# EAGLE board optodist drumdokta 0.1 (EAGLE 6.4)
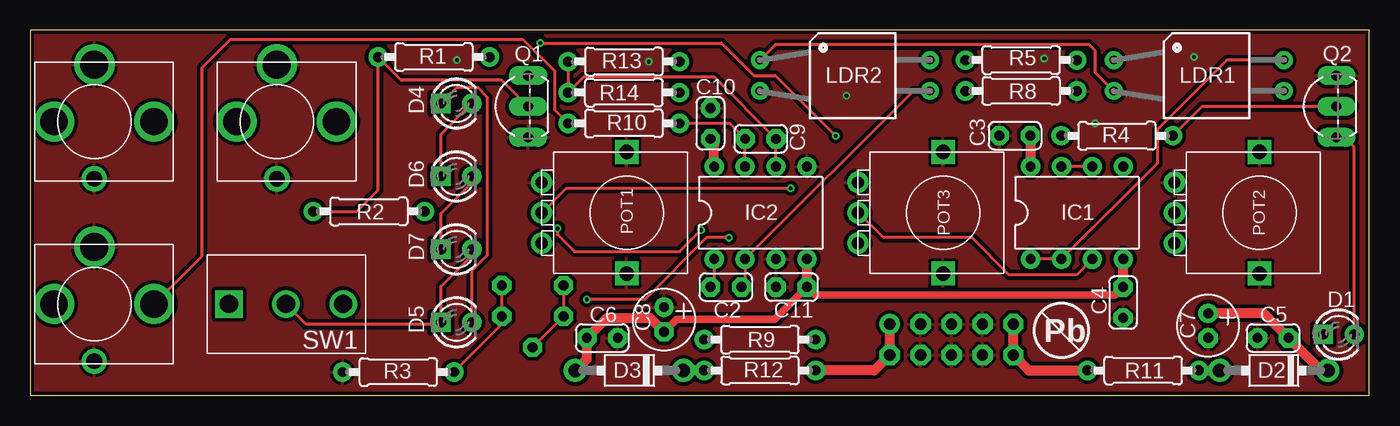
[diagram p0: board, top side]
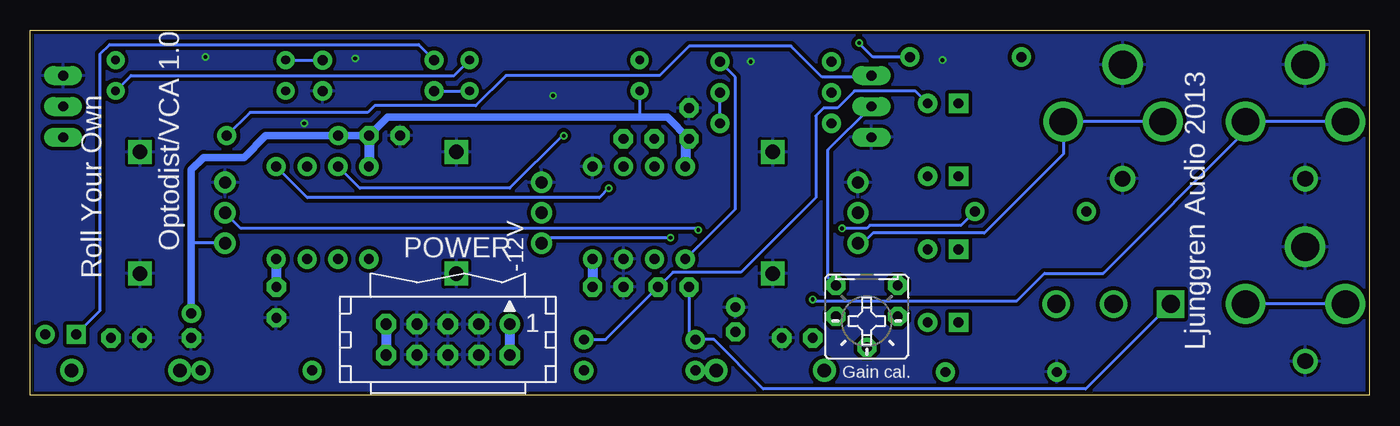
[diagram p1: board, bottom side, seen from below]

Size 110 x 30 mm. Coordinates in mm from the lower left corner, seen from the top.
Outline: 0,0 110,0 110,30 0,30 0,0
Copper layers (1*16): Top 0.035mm / dielectric 1.5mm / Bottom 0.035mm
Design rules "ITEADstudio_DRC 15 mil pads": minimum track width 6mil, minimum drill 12mil, track to track 6mil, track to pad 6mil, pad to pad 6mil, via to via 6mil, smd to smd 0mil, copper to edge 10mil, drill to drill 10mil, minimum pad ring 15mil, minimum via ring 6mil, stop-mask expansion 2mil, vias tented up to drill 100mil, thermal gap 10mil

## Footprints (pad centres in the part's own frame; a part is rotated, then mirrored left to right if it is on the bottom)
C025-024X044 = drill 0.813 octagon: 1 -1.27,0; 2 1.27,0
E2-5 = drill 0.813 pad 1.27: + -1.016,0 | drill 0.813 pad 1.27 octagon: - 1.016,0
ERTHENVAR = drill 2.3: RING1 -4.7,0 | drill 1.3: RING2 4.7,0 | drill 2.25: SHUNT 0,-3.3; TIP 0,4.9
LED3MM = drill 0.813 square: A -1.27,0 | drill 0.813: K 1.27,0
DO41-7 = drill 1.118: A 4.445,0; C -4.445,0
DIL08 = drill 0.813 pad 1.27: 1 -3.81,-3.81; 2 -1.27,-3.81; 3 1.27,-3.81; 4 3.81,-3.81; 5 3.81,3.81; 6 1.27,3.81; 7 -1.27,3.81; 8 -3.81,3.81
VTL5C = drill 0.7 pad 1.3: 1 -7.62,1.27; 2 -7.62,-1.27; 3 6.35,1.27; 4 6.35,-1.27
POT-ALPHA9 = drill 1.2 square: GND$1 -5,0; GND$2 5,0 | drill 1: LEFT -2.5,-7; MID 0,-7; RIGHT 2.5,-7
CON10L = drill 0.914: 1 5.08,1.27 | drill 0.914 octagon: 2 5.08,-1.27; 3 2.54,1.27; 4 2.54,-1.27; 5 0,1.27; 6 0,-1.27; 7 -2.54,1.27; 8 -2.54,-1.27; 9 -5.08,1.27; 10 -5.08,-1.27
TO92-LINE = drill 0.813 long: 1 2.54,0; 2 0,0; 3 -2.54,0
0207/9 = drill 0.813: 1 -4.58,0; 2 4.58,0
SPDT-HORIZONTAL-TOP-SUBMINI-MULTICOMP = drill 1.5 square: 1 4.7,0 | drill 1.5: 2 0,0; 3 -4.7,0
B25P = drill 0.813 octagon: A -2.54,0; AA -2.54,-2.54; E 2.54,0; EE 2.54,-2.54; S 0,2.54

## Placement (x,y rotation side)
C2  100pF  [C025-024X044]  57.15,8.89 180 top
C3  100nF  [C025-024X044]  80.9,21.34 180 top
C4  100nF  [C025-024X044]  89.79,7.62 90 top
C5  100nF  [C025-024X044]  102.11,4.7 180 top
C6  100nF  [C025-024X044]  46.99,4.7 180 top
C7  10uF  [E2-5]  96.77,5.71 270 top
C8  10uF  [E2-5]  52.07,6.22 270 top
C9  100pF  [C025-024X044]  60.01,21.08 180 top
C10  100nF  [C025-024X044]  55.88,22.35 90 top
C11  100nF  [C025-024X044]  62.55,8.89 0 top
CV  ERTHENVAR_3.5MM_JACK  [ERTHENVAR]  20.25,22.5 270 top
D1  [LED3MM]  107.5,5 0 top
D2  SB130  [DO41-7]  102.17,2.03 180 top
D3  SB130  [DO41-7]  49.21,2.03 180 top
D4  [LED3MM]  35,24 0 top
D5  [LED3MM]  35,6 0 top
D6  [LED3MM]  35,18 0 top
D7  [LED3MM]  35,12 0 top
IC1  TL072  [DIL08]  86,15 0 top
IC2  TL072  [DIL08]  60,15 0 top
IN  ERTHENVAR_3.5MM_JACK  [ERTHENVAR]  5.25,22.5 270 top
LDR1  SR2/SR3  [VTL5C]  96.65,26.29 0 top
LDR2  SR2/SR3  [VTL5C]  67.56,26.29 0 top
OUT  ERTHENVAR_3.5MM_JACK  [ERTHENVAR]  5.25,7.5 270 top
POT1  100K lin  [POT-ALPHA9]  49,15 270 top
POT2  25K lin  [POT-ALPHA9]  101,15 270 top
POT3  100K log  [POT-ALPHA9]  75,15 270 top
POWER  [CON10L]  75.69,4.57 0 bottom
Q1  BC557B  [TO92-LINE]  40.89,23.75 90 top
Q2  BC547B  [TO92-LINE]  107.31,23.75 90 top
R1  68K  [0207/9]  33.15,27.81 180 top
R2  100K  [0207/9]  27.81,15.11 180 top
R3  100R  [0207/9]  30.23,1.91 0 top
R4  4.7M  [0207/9]  89.28,21.34 180 top
R5  1K  [0207/9]  81.41,27.56 0 top
R8  remove  [0207/9]  81.41,25.02 180 top
R9  68K  [0207/9]  59.94,4.57 0 top
R10  1K  [0207/9]  48.77,22.35 180 top
R11  10R  [0207/9]  91.44,2.03 0 top
R12  10R  [0207/9]  59.94,2.03 180 top
R13  10K  [0207/9]  48.77,27.43 180 top
R14  10K  [0207/9]  48.77,24.89 0 top
SW1  ON-OFF  [SPDT-HORIZONTAL-TOP-SUBMINI-MULTICOMP]  21,7.5 180 top
TRIM1  2K  [B25P]  41.27,6.48 180 bottom

## Library data of the parts
C2-C11 CV D1-D7 IC1 IC2 IN OUT POT1-POT3 Q1 Q2 R1-R5 R8-R14 SW1 TRIM1 = Roll Your Own
LDR1 LDR2 = Roll Your Own; MF: VACTEC PHOTO; MPN: VTL5C9; OC_FARNELL: 2067857; OC_NEWARK: 95F9033
POWER = Roll Your Own; OC_FARNELL: unknown; OC_NEWARK: unknown

## Nets
0V: C3.2 C4.1 C5.2 C6.1 C7.- C8.+ C10.2 C11.1 CV.RING1 CV.RING2 IC2.3 IC2.5 IN.RING1 IN.RING2 OUT.RING1 OUT.RING2 POT1.GND$1 POT1.GND$2 POT1.LEFT POT2.GND$1 POT2.GND$2 POT2.LEFT POT3.GND$1 POT3.GND$2 POT3.LEFT POWER.3 POWER.4 POWER.5 POWER.6 POWER.7 POWER.8 Q1.3 Q2.1 R3.1 R8.1
+12V: C3.1 C5.1 C7.+ C10.1 D2.C IC1.8 IC2.8 LDR2.2 POT2.RIGHT R4.2
-12V: C4.2 C6.2 C8.- C11.2 D3.A IC1.4 IC2.4
AUDIO_IN: IC1.3 POT3.MID
AUDIO_OUT: C2.2 IC2.1 R9.1 R13.1 SW1.1
CV_IN: D1.A R5.1
N$1: IC1.6 IC1.7 R1.1
N$2: POT2.MID R2.1
N$3: Q1.2 R1.2 R2.2 TRIM1.E TRIM1.EE TRIM1.S
N$4: Q1.1 Q2.2 R4.1
N$5: CV.SHUNT CV.TIP POT1.RIGHT
N$6: D1.K Q2.3
N$7: R3.2 TRIM1.A TRIM1.AA
N$8: IN.SHUNT IN.TIP POT3.RIGHT
N$9: OUT.SHUNT OUT.TIP R10.2
N$10: IC1.1 IC1.2 LDR1.3
N$12: C2.1 D4.K D6.A IC2.2 LDR2.4 R8.2 R9.2
N$13: LDR1.1 R5.2
N$14: LDR1.2 LDR2.1
N$15: LDR1.4 LDR2.3
N$16: D2.A R11.2
N$17: C9.2 IC2.7 R10.1 R14.2
N$18: POWER.1 POWER.2 R12.1
N$19: POWER.9 POWER.10 R11.1
N$20: D3.C R12.2
N$21: C9.1 IC2.6 R13.2 R14.1
N$22: IC1.5 POT1.MID
N$25: D4.A D5.K
N$26: D6.K D7.A
N$27: D5.A D7.K SW1.2

## Tracks (layer width: path | path; a pad name or v marks a point on that pad's centre or on a via)
0V  (via drill 0.3)
  other vias: 95.63,27.81 83.31,27.69 87.5,22.35 67.06,24.64 35.05,27.56 50.8,27.43
  pour Top (isolate 0.305): 0,30 110,30 110,0 0,0
  pour Bottom (isolate 0.305): 0,29.97 109.98,29.97 109.98,0 0,0
+12V
  Top 0.813: D2.C 106.05,2.03 C5.1 101.35,6.73 C7.+ | IC1.8 82.19,20.55 82.17,21.21 | IC2.8 56.19,20.58 56.13,20.64
  Bottom 0.254: POT2.RIGHT 96.7,12.5 96.77,12.57 | LDR2.2 59.94,22.86
  Bottom 0.61: C7.+ 96.77,12.57 96.77,18.54 95.76,19.56 92.46,19.56 90.68,21.34 R4.2 C3.1 80.64,22.86 59.94,22.86 57.66,22.86 C10.1
  Bottom 0.813: C3.1 82.17,18.83 IC1.8 | C10.1 56.19,20.77 IC2.8
-12V
  Top 0.61: C8.- 53.09,6.22 61.15,6.22 C11.2 64.45,8.26 89.15,8.26 C4.2
  Top 0.813: D3.A 45.72,2.98 C6.2 47.37,6.35 50.93,6.35 C8.- | C11.2 63.82,10.67 | C4.2 89.79,10.67
  Bottom 0.813: IC2.4 C11.2 | C4.2 89.79,11.17 IC1.4
AUDIO_IN
  Top 0.254: IC1.3 85.99,9.91 80.39,9.91 77.34,12.95 70.1,12.95 68.06,15 POT3.MID
AUDIO_OUT
  Top 0.254: IC2.1 56.19,9.2 C2.2
  Bottom 0.254: C2.2 55.88,5.09 R9.1 53.85,4.57 49.78,0.51 23.29,0.51 SW1.1 | IC2.1 52.07,15.31 52.07,26.15 R13.1
CV_IN
  Bottom 0.254: D1.A 104.27,6.96 104.27,28.07 103.5,28.83 78.1,28.83 R5.1
N$1  (via drill 0.3)
  Top 0.254: IC1.6 IC1.7 | v41.91,28.96 56.77,28.96 59.44,26.29 61.21,26.29 v66.17,21.34
  Bottom 0.254: R1.1 40.77,27.81 v41.91,28.96 | v66.17,21.34 66.29,21.34 70.61,17.02 82.94,17.02 IC1.7
N$2  (via drill 0.3)
  Top 0.254: v43.31,13.72 43.31,13.21 44.7,11.81 53.34,11.81 v55.12,13.59
  Bottom 0.254: R2.1 33.53,13.97 41.02,13.97 41.27,13.72 v43.31,13.72 | v55.12,13.59 55.24,13.72 92.72,13.72 POT2.MID
N$3
  Top 0.254: TRIM1.S TRIM1.E TRIM1.EE | R2.2 26.8,15.11 28.57,16.89 R1.2 30.47,25.91 38.73,25.91 Q1.2
  Bottom 0.254: TRIM1.EE 44.45,9.65 44.45,20.19 Q1.2
N$4
  Top 0.254: Q2.2 96.27,23.75 R4.1
  Bottom 0.254: Q1.1 40.64,26.16 44.96,26.16 47.5,28.7 55.88,28.7 58.29,26.29 70.93,26.29 73.41,23.81 81.72,23.81 82.3,23.24 91.96,23.24 R4.1
N$5
  Bottom 0.254: CV.SHUNT CV.TIP 25.14,19.82 31.62,13.34 40.78,13.34 41.53,12.57 41.93,12.57 POT1.RIGHT
N$6
  Top 0.254: D1.K 108.77,20.39 108.08,21.08 107.44,21.08 Q2.3
N$7
  Top 0.254: TRIM1.AA TRIM1.A 38.73,5.83 R3.2
N$8  (via drill 0.3)
  Top 0.254: v57.4,12.95 55.56,12.95 50.48,7.87 v45.72,7.87
  Bottom 0.254: IN.SHUNT IN.TIP 10.16,21.72 21.84,10.03 26.67,10.03 28.96,7.75 45.59,7.75 v45.72,7.87 | POT3.RIGHT 67.55,12.95 v57.4,12.95
N$9
  Top 0.254: OUT.TIP 14.1,11.46 14.1,26.92 16.45,29.27 40.45,29.27 43.05,26.67 43.05,23.49 R10.2
  Bottom 0.254: OUT.SHUNT OUT.TIP
N$10
  Top 0.254: LDR1.3 98.3,27.56 92.58,21.84 92.58,19.04 IC1.2 IC1.1
N$12
  Top 0.254: C2.1 58.73,9.2 IC2.2 72.56,25.02 LDR2.4 | D6.A 33.73,21.46 D4.K
  Bottom 0.254: R8.2 LDR2.4 | R9.2 62.74,4.57 C2.1 57.21,10.1 51.63,10.1 45.47,16.26 45.47,22.99 44.83,23.62 43.69,23.62 42.29,25.02 37.29,25.02 D4.K
N$13
  Bottom 0.254: LDR1.1 R5.2
N$14
  Top 0.254: LDR1.2 87.5,26.54 87.5,28.32 87,28.83 61.21,28.83 LDR2.1
N$15
  Bottom 0.254: LDR1.4 101.73,26.29 75.18,26.29 LDR2.3
N$16
  Top 0.813: R11.2 D2.A
N$17
  Top 0.254: IC2.7 C9.2 57.47,22.35 R10.1
  Bottom 0.254: R10.1 R14.2
N$18
  Top 0.813: POWER.1 POWER.2 69.34,2.03 R12.1
  Bottom 0.813: POWER.1 70.61,3.81
N$19
  Top 0.813: POWER.9 POWER.10 82.04,2.03 R11.1
  Bottom 0.813: POWER.9 80.77,3.81
N$20
  Top 0.813: R12.2 D3.C
N$21
  Top 0.254: IC2.6 C9.1 56.2,26.16 45.46,26.16 R14.1 R13.2
N$22  (via drill 0.3)
  Top 0.254: POT1.MID 42.05,15 44.07,17.02 v62.48,17.02
  Bottom 0.254: v62.48,17.02 63.25,16.26 87.26,16.26 IC1.5
N$25
  Top 0.254: D5.K 36.27,10.23 37.53,11.49 37.53,24.51 36.77,25.27 35,25.27 D4.A
N$26
  Top 0.254: D7.A 33.73,14.95 36.2,17.4 36.2,17.93 D6.K
N$27
  Top 0.254: D7.K 36.2,11.93 36.2,11.43 33.73,8.95 D5.A 33.57,5.84 22.66,5.84 SW1.2

## Text on the board
tPlace: Pb
bPlace: Optodist/VCA 1.0 | Roll Your Own | Ljunggren Audio 2013 | -12V | Gain cal.